# Altium PCB Copy of Line_follower1_PCB.PcbDoc (part 1 of 2)
Units mil, origin at the board's own origin, x right, y up, seen from the top; angles counter-clockwise.
Board outline 6000 x 4000 mil, 2 copper layers (Top Layer, Bottom Layer); 67 components, 62 nets, 271 pads, 117 vias.
Unrouted connection lines stored in the file: 3.
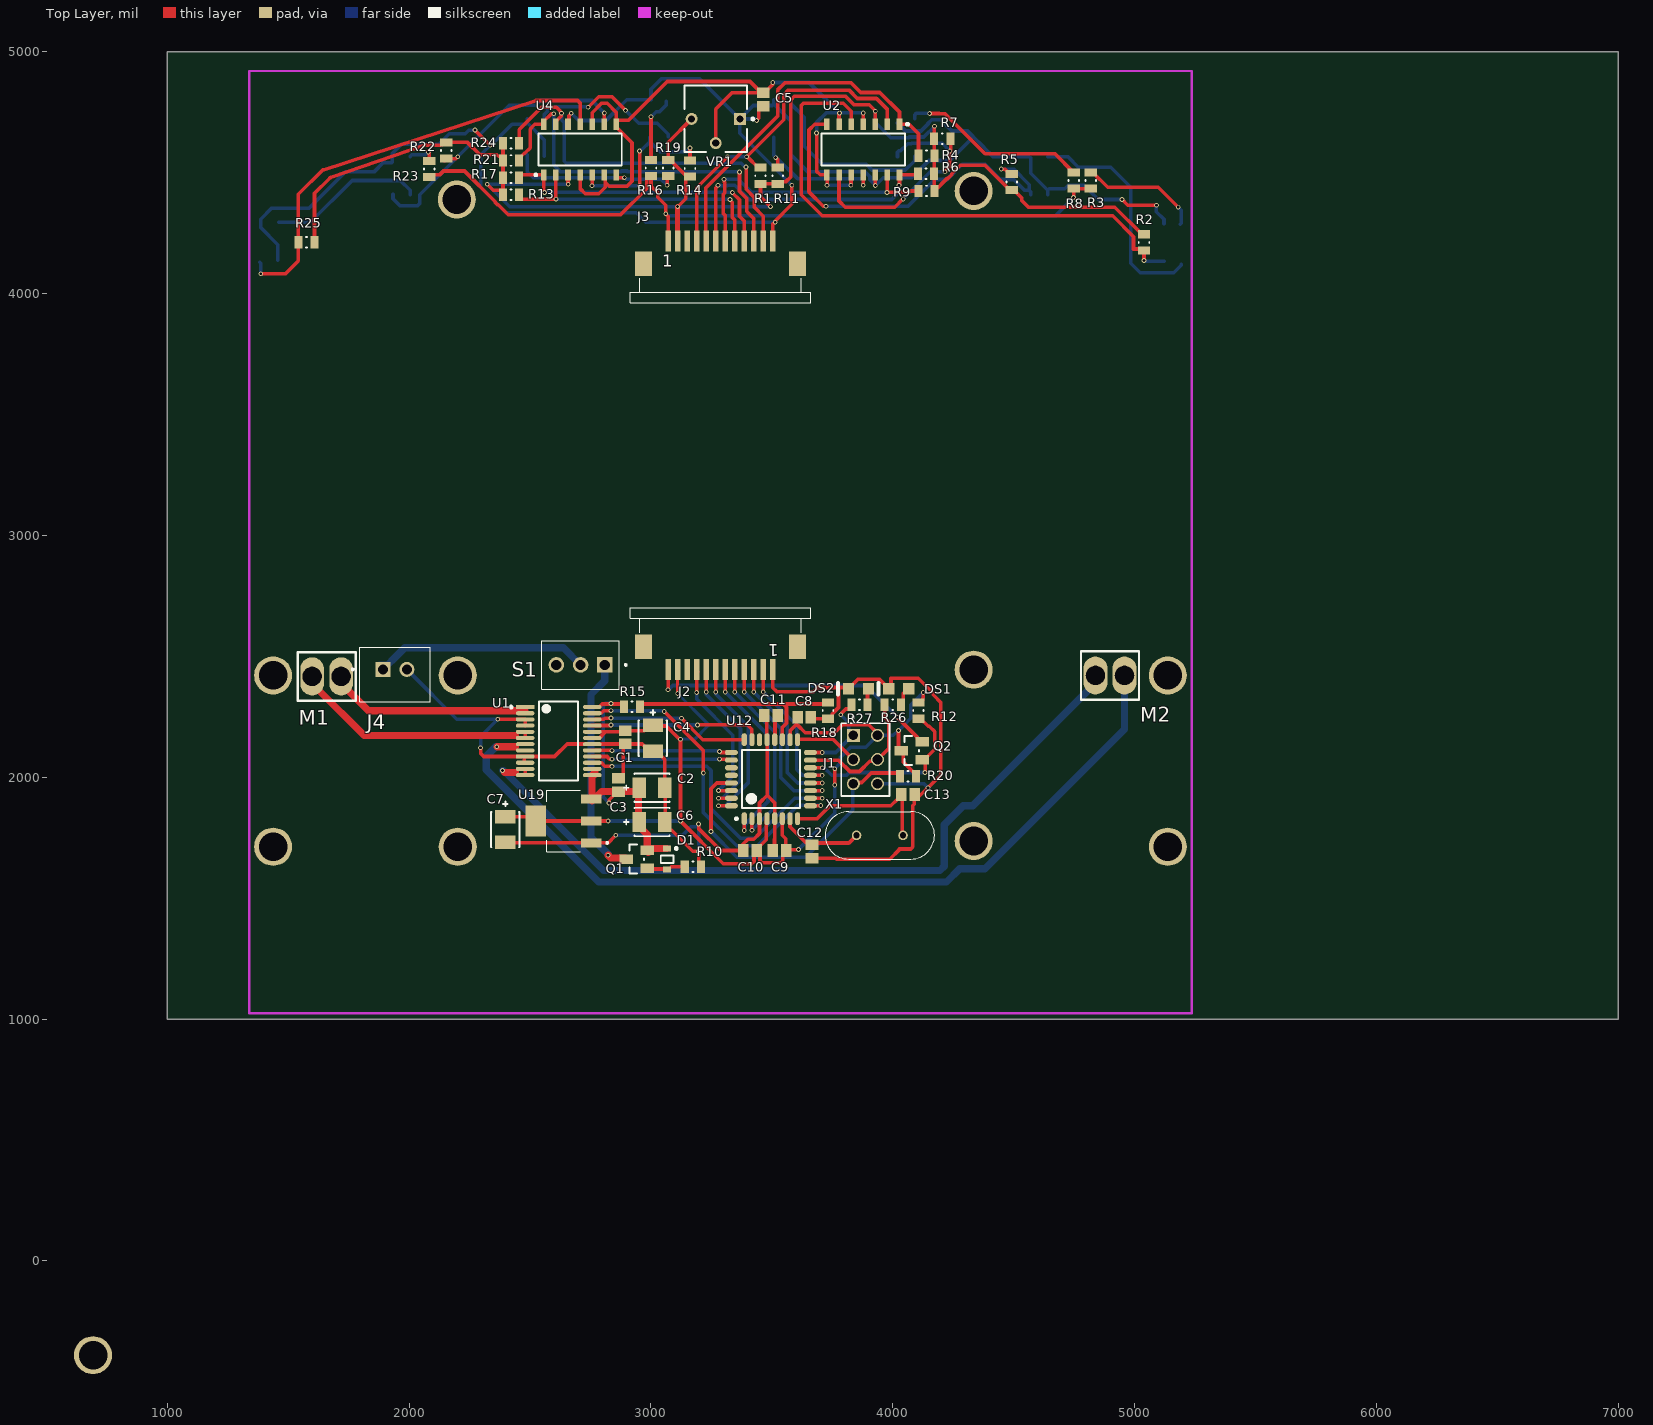
[diagram p0: Top Layer view]
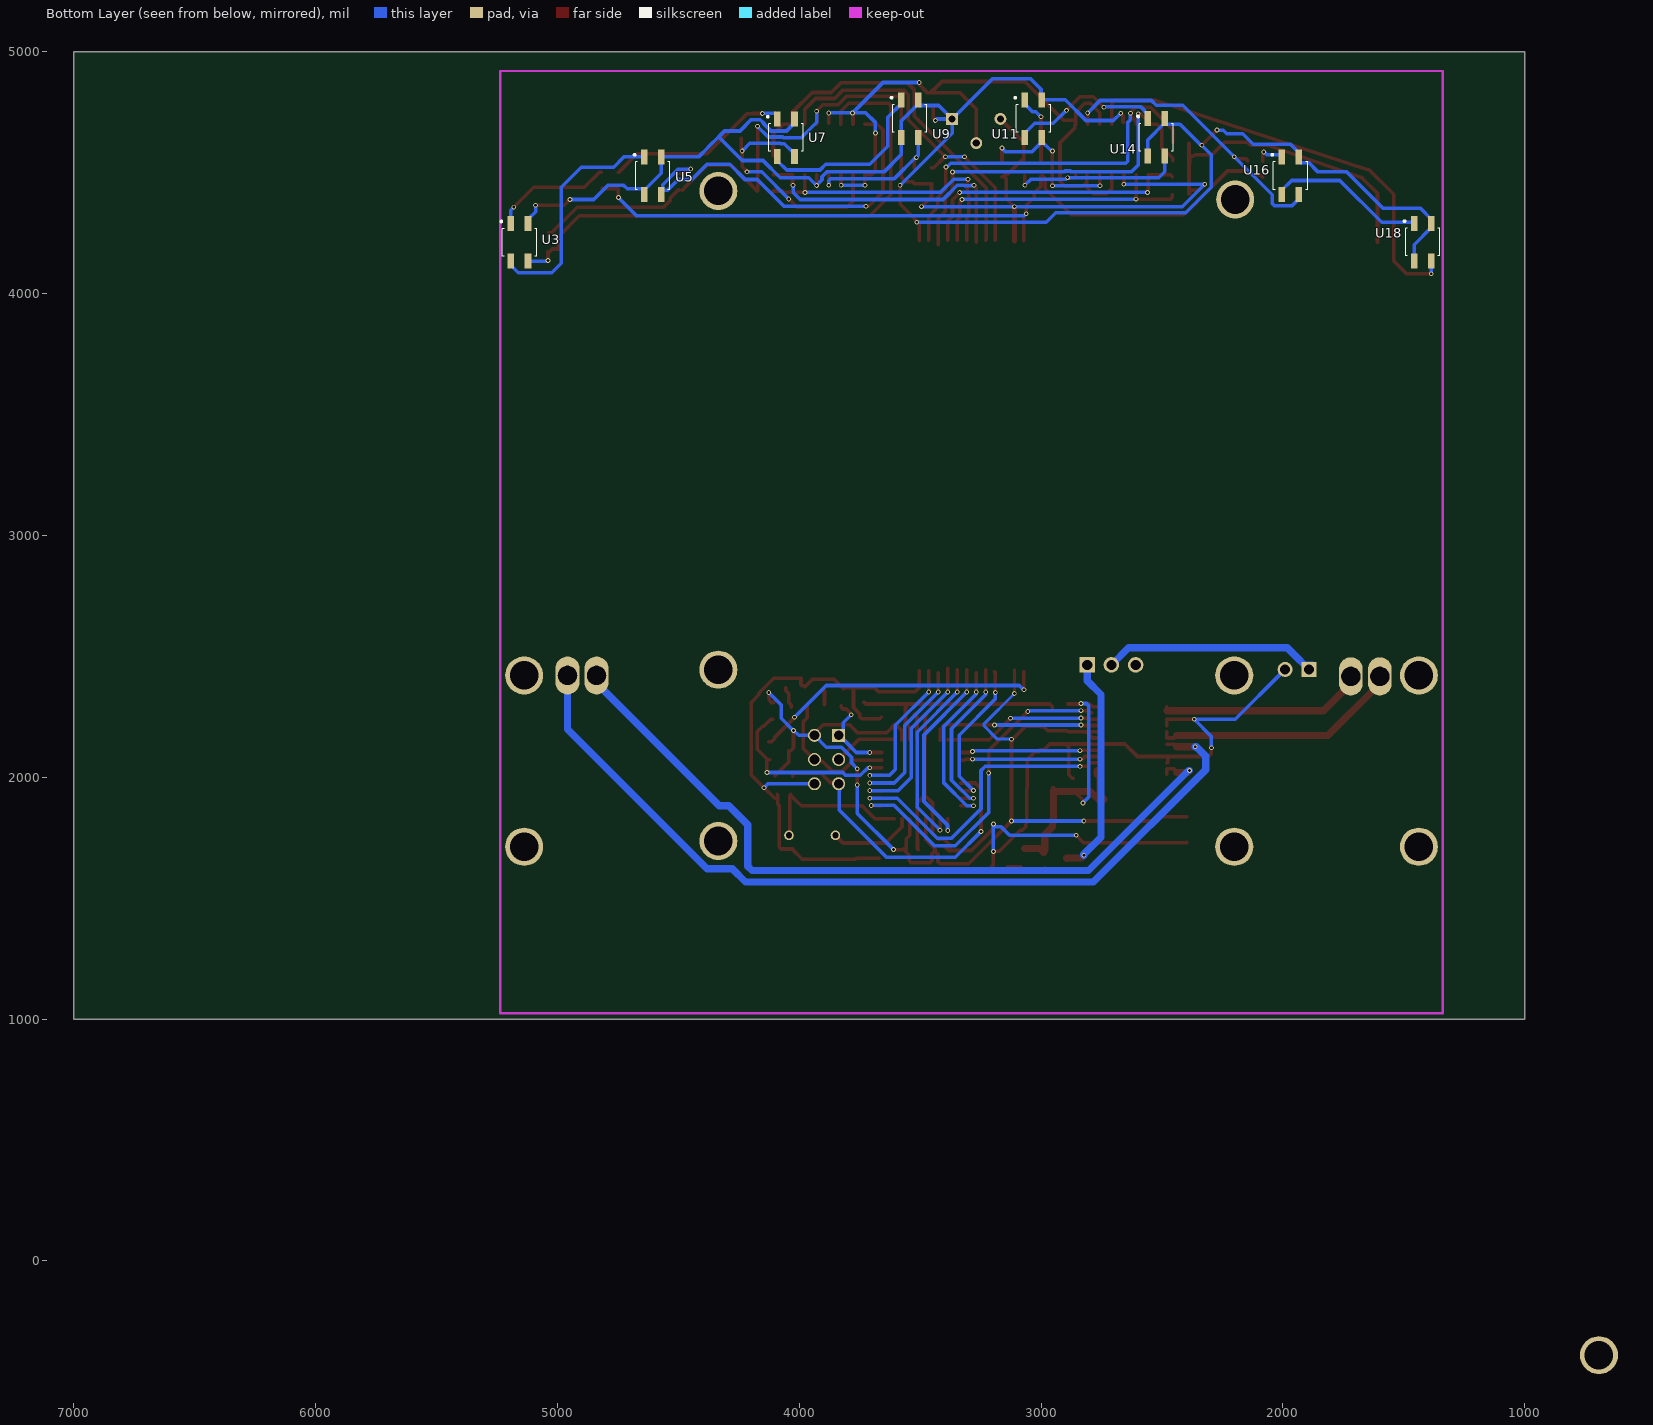
[diagram p1: Bottom Layer view, seen from below]

## Layer stack, top to bottom
Top Solder: solder mask 0.4, Solder Resist, Dk 3.5
Top Layer: signal copper 1.4
Dielectric 1: dielectric 12.6, FR-4, Dk 4.8
Bottom Layer: signal copper 1.4
Bottom Solder: solder mask 0.4, Solder Resist, Dk 3.5

## Board outline
1000,1000 7000,1000 7000,5000 1000,5000

## Design rules (kind name [scope] priority, off if disabled: settings)
Clearance [All] p1: gap=10 ignorepadtopadclearanceinfootprint=FALSE except(0: Arc-Hole Track-Hole SMDPad-Hole THPad-Hole Via-Hole Fill-Hole Poly-Hole Region-Hole Text-Hole; 5: SMDPad-SMDPad; 7.87: Arc-SMDPad Track-SMDPad; 19.68: THPad-THPad)
HoleSize [All] p1: absolutevalues=TRUE maxlimit=248.03 minlimit=11.81 maxpercent=80.000 minpercent=20.000
PolygonConnect [All] p1: connectstyle=Relief reliefconductorwidth=10 reliefentries=4 polygonreliefangle="90 Angle" airgapwidth=10
RoutingVias [All] p1: holewidth=11.81 width=19.68 viastyle="Through Hole" minholewidth=11.81 minwidth=19.68 maxholewidth=19.68 maxwidth=27.56
SilkToSolderMaskClearance [IsPad] p1: minsilkscreentomaskgap=3.94 clearancetoexposedcopper=TRUE
SolderMaskExpansion SolderMaskExpansion_Vias [IsVia] p1: expansion=4 istentingtop=TRUE
SolderMaskExpansion [All] p2: expansion=4 istentingtop=FALSE
Width [All] p1: maxlimit=100 minlimit=10 preferedwidth=19.68 minimp=50.000000 maximp=50.000000 favimp=50.000000
28 further rules are at their usual default settings.

## Components (designator, comment, footprint, x,y, rotation, side; value= is the part's Value field where it differs from the comment)
C1 "100n" CAPC2013X88X50LL20T25 2893.7,2165.35 r90 top
C2 "10u" FP-T491B106K020AT-MFG 3003.94,1956.69 r180 top
C3 "100n" CAPC2013X88X50LL20T25 2866.14,1968.5 r270 top
C4 "10u" FP-T491B106K020AT-MFG 3007.87,2161.42 r90 top
C5 "100n" CAPC2013X88X50LL20T25 3464.57,4803.15 r90 top
C6 "10u" FP-T491B106K020AT-MFG 3003.94,1814.96 r180 top
C7 "10u" FP-T491B106K020AT-MFG 2397.64,1783.46 r90 top
C8 "100n" CAPC2013X88X50LL20T25 3633.86,2248.03 r180 top
C9 "100n" CAPC2013X88X50LL20T25 3531.5,1696.85 r0 top
C10 "100n" CAPC2013X88X50LL20T25 3409.45,1696.85 r0 top
C11 "100n" CAPC2013X88X50LL20T25 3496.06,2255.91 r0 top
C12 "22p" CAPC2013X88X50LL20T25 3665.35,1692.91 r270 top
C13 "22p" CAPC2013X88X50LL20T25 4062.99,1929.13 r0 top
D1 "MM3Z10VT1G" ONSC-SOD-323-2-477-02_V 3066.93,1661.42 r270 top
DS1 "HSMG-C170" AVAG-HSMX-C170_V 4025.59,2366.14 r180 top
DS2 "HSMG-C170" AVAG-HSMX-C170_V 3858.27,2366.14 r180 top
J1 "TSW-103-15-F-D" SAMTEC_TSW-103-15-F-D 3837.01,2173.23 r270 top
J2 "68611214422" 68611214422 3287.4,2539.37 r180 top
J3 "68611214422" 68611214422 3287.4,4124.02 r0 top
J4 "B2B-XH-A(LF)(SN)" JST_B2B-XH-A(LF)(SN) 1940.94,2425.2 r180 top
M1 "Component_1" PCBComponent_1 1718.43,2417.32 r180 top
M2 "Component_1" PCBComponent_1 4838.58,2421.26 r0 top
Q1 "FDN340P" FP-527AG-MFG 2940.95,1661.42 r180 top
Q2 "FDN340P" FP-527AG-MFG 4078.74,2110.24 r180 top
R1 "10k" RESC0805(2012)_L 3452.76,4488.19 r270 top value="12000.00 Ohm"
R2 "10k" RESC0805(2012)_L 5039.37,4212.6 r90 top value="12000.00 Ohm"
R3 "220R" RESC0805(2012)_L 4818.9,4468.5 r90 top value="12000.00 Ohm"
R4 "10k" RESC0805(2012)_L 4139.76,4570.87 r0 top value="12000.00 Ohm"
R5 "10k" RESC0805(2012)_L 4492.13,4462.6 r270 top value="12000.00 Ohm"
R6 "10k" RESC0805(2012)_L 4137.8,4496.06 r0 top value="12000.00 Ohm"
R7 "10k" RESC0805(2012)_L 4204.72,4641.73 r180 top value="12000.00 Ohm"
R8 "220R" RESC0805(2012)_L 4748.03,4468.5 r90 top value="12000.00 Ohm"
R9 "10k" RESC0805(2012)_L 4139.76,4425.2 r0 top value="12000.00 Ohm"
R10 "10k" RESC0805(2012)_L 3173.23,1629.92 r180 top value="12000.00 Ohm"
R11 "10k" RESC0805(2012)_L 3523.62,4488.19 r270 top value="12000.00 Ohm"
R12 "10k" RESC0805(2012)_L 4106.3,2275.59 r90 top value="12000.00 Ohm"
R13 "10k" RESC0805(2012)_L 2421.26,4409.45 r180 top value="12000.00 Ohm"
R14 "10k" RESC0805(2012)_L 3161.42,4517.72 r270 top value="12000.00 Ohm"
R15 "10k" RESC0805(2012)_L 2921.26,2291.34 r180 top value="12000.00 Ohm"
R16 "220R" RESC0805(2012)_L 3000,4519.69 r90 top value="12000.00 Ohm"
R17 "10k" RESC0805(2012)_L 2421.26,4480.31 r180 top value="12000.00 Ohm"
R18 "10k" RESC0805(2012)_L 3732.28,2275.59 r90 top value="12000.00 Ohm"
R19 "10k" RESC0805(2012)_L 3070.87,4519.69 r90 top value="12000.00 Ohm"
R20 "10k" RESC0805(2012)_L 4062.99,2003.94 r180 top value="12000.00 Ohm"
R21 "10k" RESC0805(2012)_L 2421.26,4551.18 r180 top value="12000.00 Ohm"
R22 "10k" RESC0805(2012)_L 2153.54,4592.52 r90 top value="12000.00 Ohm"
R23 "220R" RESC0805(2012)_L 2082.68,4515.75 r90 top value="12000.00 Ohm"
R24 "10k" RESC0805(2012)_L 2421.26,4622.05 r180 top value="12000.00 Ohm"
R25 "10k" RESC0805(2012)_L 1574.8,4212.6 r0 top value="12000.00 Ohm"
R26 "470R" RESC0805(2012)_L 4000,2299.21 r180 top value="12000.00 Ohm"
R27 "470R" RESC0805(2012)_L 3862.2,2299.21 r180 top value="12000.00 Ohm"
S1 "2MS1T1B1M2QES" SW_2MS1T1B1M2QES 2708.66,2464.57 r180 top
U1 "TB6612FNG,C,8,EL" FP-SSOP24-P-300-0_65A-IPC_A 2618.11,2149.61 r0 top
U2 "LM339DR2G" ONSC-SOIC-14-751A-03_V 3877.95,4596.46 r270 top
U3 "QRE1113GR" SOIC180P460X187-4N 5157.48,4212.6 r180 bottom
U4 "LM339DR2G" ONSC-SOIC-14-751A-03_V 2706.69,4596.46 r90 top
U5 "QRE1113GR" SOIC180P460X187-4N 4606.3,4488.19 r180 bottom
U7 "QRE1113GR" SOIC180P460X187-4N 4055.12,4645.67 r180 bottom
U9 "QRE1113GR" SOIC180P460X187-4N 3543.31,4724.41 r180 bottom
U11 "QRE1113GR" SOIC180P460X187-4N 3031.5,4724.41 r180 bottom
U12 "ATmega328-AUR" 32A_L 3496.06,1992.13 r90 top
U14 "QRE1113GR" SOIC180P460X187-4N 2523.62,4646.65 r180 bottom
U16 "QRE1113GR" SOIC180P460X187-4N 1968.5,4488.19 r180 bottom
U18 "QRE1113GR" SOIC180P460X187-4N 1421.26,4213.58 r180 bottom
U19 "LM1117MP-5.0" SOT230P700X180-4N 2637.8,1818.9 r180 top
VR1 "3362P-1-103LF" BOUR-3362P 3267.72,4724.41 r180 top
X1 "ABL-16.000MHZ-T" XTAL_HC49P488W46L1150T500H350 3946.46,1759.84 r180 top

## Footprints (in the part's own frame and the unit in brackets; to place one, negate y for a bottom-side part, rotate by r counter-clockwise, add the part's x,y. Pads: shape width x height; smd on the part's side, far side on the other; paste and mask are expansions set on the pad)
32A_L [mm] "Thin QFP, 32-Leads, Body 7x7mm, Pitch 0.8mm, IPC High Density"
  oval 1.35x0.55 smd: 1(-4.15,2.8) 2(-4.15,2) 3(-4.15,1.2) 4(-4.15,0.4) 5(-4.15,-0.4) 6(-4.15,-1.2) 7(-4.15,-2) 8(-4.15,-2.8) 17(4.15,-2.8) 18(4.15,-2) 19(4.15,-1.2) 20(4.15,-0.4) 21(4.15,0.4) 22(4.15,1.2) 23(4.15,2) 24(4.15,2.8)
  oval 0.55x1.35 smd: 9(-2.8,-4.15) 10(-2,-4.15) 11(-1.2,-4.15) 12(-0.4,-4.15) 13(0.4,-4.15) 14(1.2,-4.15) 15(2,-4.15) 16(2.8,-4.15) 25(2.8,4.15) 26(2,4.15) 27(1.2,4.15) 28(0.4,4.15) 29(-0.4,4.15) 30(-1.2,4.15) 31(-2,4.15) 32(-2.8,4.15)
  silkscreen extent -4.27,-3.05 3.05,3.75, body extent -3.5,-3.5 3.5,3.5, height 1.2
68611214422 [mm]
  rect 0.6x2.2 smd: 1(-5.5,2.4) 2(-4.5,2.4) 3(-3.5,2.4) 4(-2.5,2.4) 5(-1.5,2.4) 6(-0.5,2.4) 7(0.5,2.4) 8(1.5,2.4) 9(2.5,2.4) 10(3.5,2.4) 11(4.5,2.4) 12(5.5,2.4)
  rect 1.8x2.6 smd: Z1(-8.1,0) Z2(8.1,0)
  silkscreen extent -9.5,-4.1 9.5,-1.5
AVAG-HSMX-C170_V [mm] "SMD, 2-Leads, Body 2x1.25mm, Height 0.8mm"
  rect 1.2x1.2 smd: 1(-1.05,0) 2(1.05,0)
  silkscreen extent 2.15,-0.63 2.15,0.63, body extent -1,-0.63 1,0.63, height 0.8
BOUR-3362P [mm] "THD, 3-Leads, Body 6.6x6.99mm, Pitch 2.54mm"
  rect 1.25x1.25 hole 0.75: 1(-2.54,0.035)
  round 1.25 hole 0.75: 2(0,2.575) 3(2.54,0.035)
  silkscreen extent -4.03,-3.49 3.3,3.5, body extent -3.3,-3.49 3.3,3.49, height 4.95
CAPC2013X88X50LL20T25 [mm] "Chip Capacitor, 2-Leads, Body 2.00x1.25mm, IPC High Density"
  rect 1.1x1.35 smd: 1(-0.7,0) 2(0.7,0)
  body extent -1.1,-0.72 1.1,0.72, height 0.88
FP-527AG-MFG [mm]
  rect 1.4x1 smd paste+0 mask+0: 1(-1.1,0.95) 2(-1.1,-0.95) 3(1.1,0)
  silkscreen extent -0.76,-1.52 0.76,1.52, body extent -1.9,-1.62 1.9,1.62, height 0.25
FP-SSOP24-P-300-0_65A-IPC_A [mm]
  rect 1.954x0.432 smd paste+0 mask+0: 1(-3.525,3.575)
  rrect100% 1.954x0.432 smd paste+0 mask+0: 2(-3.525,2.925) 3(-3.525,2.275) 4(-3.525,1.625) 5(-3.525,0.975) 6(-3.525,0.325) 7(-3.525,-0.325) 8(-3.525,-0.975) 9(-3.525,-1.625) 10(-3.525,-2.275) 11(-3.525,-2.925) 12(-3.525,-3.575) 13(3.525,-3.575) 14(3.525,-2.925) 15(3.525,-2.275) 16(3.525,-1.625) 17(3.525,-0.975) 18(3.525,-0.325) 19(3.525,0.325) 20(3.525,0.975) 21(3.525,1.625) 22(3.525,2.275) 23(3.525,2.925) 24(3.525,3.575)
  silkscreen extent -5.13,-4.15 2.05,4.15, body extent -5,-4.65 5,4.65, height 0.25
FP-T491B106K020AT-MFG [mm]
  rect 1.42x2.13 smd paste+0 mask+0: 1(-1.35,0) 2(1.35,0)
  silkscreen extent -1.85,-1.5 2.95,1.5, body extent -2.18,-1.62 2.18,1.62, height 0.25
JST_B2B-XH-A(LF)(SN) [mm]
  rect 1.575x1.575 / inner round 1.575 / far side rect 1.575x1.575 hole 1.05: 1(1.25,-0.525)
  round 1.575 hole 1.05: 2(-1.25,-0.525)
  silkscreen extent -3.7,-2.88 4.54,2.88, body extent -3.7,-2.88 3.7,2.88, height 7
ONSC-SOD-323-2-477-02_V [mm] "SOD, 2-Leads, Body 1.7x1.25mm"
  rect 0.63x0.83 smd: 1(-1.115,0) 2(1.115,0)
  silkscreen extent -1.24,-0.67 0.4,1.09, body extent -0.85,-0.63 0.85,0.63, height 1.06
ONSC-SOIC-14-751A-03_V [mm] "SOIC, 14-Leads, Body 8.75x4mm, Pitch 1.27mm"
  rect 1.18x0.58 smd: 1(-2.66,3.81) 2(-2.66,2.54) 3(-2.66,1.27) 4(-2.66,0) 5(-2.66,-1.27) 6(-2.66,-2.54) 7(-2.66,-3.81) 8(2.66,-3.81) 9(2.66,-2.54) 10(2.66,-1.27) 11(2.66,0) 12(2.66,1.27) 13(2.66,2.54) 14(2.66,3.81)
  silkscreen extent -2.78,-4.38 1.67,4.78, body extent -2,-4.38 2,4.38, height 1.75
PCBComponent_1 [mm]
  oval 2.5x4 hole 2: 1(0,0) 2(3.048,0)
  silkscreen extent -1.52,-2.54 4.57,2.54
RESC0805(2012)_L [mm] "Chip Resistor, Body 2.0x1.3mm, IPC High Density"
  rect 0.85x1.3 smd: 1(-0.85,0) 2(0.85,0)
  silkscreen extent -0.05,-0.55 0.05,0.55, body extent -1.1,-0.67 1.1,0.68, height 0.7
SAMTEC_TSW-103-15-F-D [mm]
  rect 1.37x1.37 hole 1.02: 01(0,0)
  round 1.37 hole 1.02: 02(0,2.54) 03(2.54,0) 04(2.54,2.54) 05(5.08,0) 06(5.08,2.54)
  silkscreen extent -2.02,-1.27 6.35,3.81
SOIC180P460X187-4N [mm]
  rect 0.69x1.57 smd: 1(-0.9,1.975) 2(-0.9,-1.975) 3(0.9,-1.975) 4(0.9,1.975)
  silkscreen extent -2,-1.45 1.8,2.3, body extent -1.7,-2.3 1.7,2.3, height 1.87
SOT230P700X180-4N [mm]
  rect 2.15x0.95 smd: 1(-2.9,2.3) 2(-2.9,0) 3(-2.9,-2.3)
  rect 2.15x3.25 smd: 4(2.9,0)
  silkscreen extent -4.7,-3.25 1.75,3.25
SW_2MS1T1B1M2QES [mm]
  rect 1.635x1.635 / inner round 1.635 / far side rect 1.635x1.635 hole 1.09: 1(-2.54,0)
  round 1.635 hole 1.09: 2(0,0) 3(2.54,0)
  silkscreen extent -4.85,-2.54 4.07,2.54, body extent -4.07,-3 4.07,3, height 23.63
XTAL_HC49P488W46L1150T500H350 [mm]
  round 1.007 hole 0.657: 1(-2.44,0) 2(2.44,0)
  silkscreen extent -5.75,-2.5 5.75,2.5, body extent -5.75,-3.25 5.75,5.75, height 2.5

## Part data
C1 C3 C5 C8 C9 C10 C11 C12 C13: library part CMP-2007-00266-1, "0805", Manufacturer=Kemet, Part Number=C0805C103K5RACTU
C2 C4 C6 C7: library part CMP-2000-07191-2, "CAP TANT 10UF 10% 20V 1411", Capacitance=10uF, Case Code (Imperial)=1411, Case Code (Metric)=3528, Dielectric Material=Tantalum, ESR (Equivalent Series Resistance)=2.1R, Leakage Current=2uA, Max Operating Temperature=125°C, Min Operating Temperature=-55°C, Package Quantity=1, Ripple Current=201mA, Tolerance=10%, Voltage=20V, Case/Package=1411, Depth=2.8mm, Dissipation Factor=6%, Failure Rate=0.001%, Features="General Purpose", Height=1.9mm, Height - Seated (Max)=0.083inch, Lead Free="Lead Free", Length=3.5mm, Life (Hours)=2000Hour, Mount="Surface Mount", Number of Pins=2, Packaging="Tape and Reel", Polarity=Polar, Radiation Hardening=No, REACH SVHC="No SVHC", RoHS Compliant=Yes, Termination=SMD/SMT, Voltage Rating=20V, Voltage Rating (DC)=20V, Weight=0.002293oz, Width=2.8mm
D1: library part CMP-1060-00715-1, "Zener Voltage Regulator, 300 mW, 2-Pin SOD-323, Pb-Free, Tape and Reel", Manufacturer="On Semiconductor", ComponentLink1Description="Manufacturer URL", ComponentLink1URL=http://www.onsemi.com/, ComponentLink2Description=Datasheet, ComponentLink2URL=http://www.onsemi.cn/pub_link/Collateral/MM3Z2V4T1-D.PDF, ComponentLink3Description="Package Specification", ComponentLink3URL=http://www.onsemi.com/pub_link/Collateral/477-02.PDF.1, DatasheetVersion="Rev. 9", Mounting Technology="Surface Mount", P Max (W)=0.3, PackageDescription="2-Pin SOD, Body 1.7 x 1.25 mm", PackageReference=SOD-323-2-477-02, PackageVersion="Rev. H, 03/2007", Packing="Tape and Reel", PartNumber=MM3Z10VT1G, RoHS=Pb-Free, VZ Typ (V)=10
DS1 DS2: library part CMP-2000-05062-1, "Chip LED, Green, 2.2 V, -40 to 85 degC, 2-Pin SMD, Pb-Free, Tape and Reel", Forward Current If=20mA, Forward Voltage=2.2V, Forward Voltage VF Max=2.6V, LED Colour=Green, Manufacturer=Avago, Operating Temperature Max=85degC, Operating Temperature Min=-30degC, Operating Temperature Range=-30degCto+85degC, Opto Case Style=SMD, Package Description="2-Pin Surface Mount Device, Body 2 x 1.25 mm, Height 0.8 mm", Package Reference=HSMX-C170, Storage Temperature Min=-40degC, Bulb Size=1.25mmx1.4mm, Datasheet URL=https://datasheet.ciiva.com/29280/180495-da-01-en-chip-led-hsmg-c170-gelb-gruen-29280971.pdf, Datasheet Version=Oct-08, Dominant Wavelength=572nm, Dominant Wavelength Typ=572nm, External Depth=0.8mm, External Length / Height=2mm, External Width=1.25mm, Forward Current If Max=20mA, LED Mounting=SMD, LED Type=Standard, Lens Shape=Rectangular, Light Area Height=1mm, Luminous Intensity=15mcd, Luminous Intensity Min=4mcd, Luminous Intensity Typ=15mcd, Manufacturer URL=http://www.avagotech.com/, Mounting Type=SMD, MSL=MSL2A-4weeks, No. of Pins=2, Opto Mounting Orientation=Top, Packaging=CutTape, Peak Forward Current=20mA, Peak Wavelength=570nm, PIV Max=5V, Storage Temperature Max=85degC, SVHC=NoSVHC(16-Jun-2014), Viewing Angle=170deg, Voltage Vf Typ=2.2V, Wavelength Typ=570nm
J1: Package=None, Availability=Unavailable, MP=TSW-103-15-F-D, Price=None
J2 J3: "12 Position FPC Connector Contacts, Bottom 0.039 (1.00mm) Surface Mount, Right Angle", Package=None, Availability="In Stock", Check_prices=https://www.snapeda.com/parts/68611214422/Wurth+Elektronik/view-part/?ref=eda, MF="Wurth Elektronik", MP=68611214422, Price=None, Purchase-URL=https://pricing.snapeda.com/search/part/68611214422/?ref=eda, SnapEDA_Link=https://www.snapeda.com/parts/68611214422/Wurth+Elektronik/view-part/?ref=snap
J4: "Connector Header Through Hole 2 position 0.098 (2.50mm)", Package=None, Check_prices=https://www.snapeda.com/parts/B2B-XH-A(LF)(SN)/JST+Sales+America+Inc./view-part/?ref=eda, MF="JST Sales America Inc.", MP=B2B-XH-A(LF)(SN), SnapEDA_Link=https://www.snapeda.com/parts/B2B-XH-A(LF)(SN)/JST+Sales+America+Inc./view-part/?ref=snap
M1 M2: "Pady do silnika"
Q1 Q2: library part CMP-2100-03638-2, "MOSFET P-CH 20V 2A SSOT3", Case/Package=SOT-23, Continuous Drain Current (ID)=2A, Current Rating=-2A, Drain to Source Breakdown Voltage=-20V, Drain to Source Resistance=60mR, Drain to Source Voltage (Vdss)=20V, Gate to Source Voltage (Vgs)=8V, Input Capacitance=779pF, Max Operating Temperature=150°C, Max Power Dissipation=500mW, Min Operating Temperature=-55°C, On-State Resistance=70MR, Package Quantity=1, Threshold Voltage=-800mV, Contact Plating=Tin, Dual Supply Voltage=-20V, Element Configuration=Single, Fall Time=11ns, Height=0.94mm, Lead Free="Lead Free", Length=2.92mm, Mount="Surface Mount", Nominal Vgs=-800mV, Number of Elements=1, Number of Pins=3, Packaging="Tape and Reel", Power Dissipation=500mW, Radiation Hardening=No, Rds On Max=70mR, REACH SVHC="No SVHC", Rise Time=9ns, Termination=SMD/SMT, Turn-Off Delay Time=27ns, Turn-On Delay Time=10ns, Voltage Rating (DC)=-20V, Weight=0.03g, Width=3.05mm
R1 R2 R4 R5 R6 R7 R9 R10 R11 R12 R13 R14 R15 R17 R18 R19 R20 R21 R22 R24 R25: library part CMP-1013-00631-1, "10K 0.125W 1% 0805 (2012 Metric)  SMD", Case-EIA=0805, Case-Metric=2012, Power="0.125 W", Tolerance="1 %", Technology=SMT
R3 R8 R16 R23 R26 R27: library part CMP-1013-00631-1, "220 0.125W 1% 0805 (2012 Metric)  SMD", Case-EIA=0805, Case-Metric=2012, Power="0.125 W", Tolerance="1 %", Technology=SMT
S1: "Toggle Switches Sub-Miniature SPDT switch on-on pc thru-hole", Package=None, Check_prices=https://www.snapeda.com/parts/2MS1T1B1M2QES/E%2526E/view-part/?ref=eda, MF=Dailywell, MP=2MS1T1B1M2QES, SnapEDA_Link=https://www.snapeda.com/parts/2MS1T1B1M2QES/E%2526E/view-part/?ref=snap
U1: library part CMP-2100-03693-4, "IC MOTOR DRIVER 2.7V-5.5V 24SSOP", Case/Package=SSOP, Max Operating Temperature=85°C, Max Supply Voltage=5.5V, Min Operating Temperature=-20°C, Min Supply Voltage=2.7V, Operating Supply Voltage=3V, Output Current=1A, Package Quantity=1, Interface=Parallel, Logic Function="AND GATE", Mount="Surface Mount", Number of Outputs=2, Number of Pins=24, Packaging="Tape and Reel", Series=-
U2 U4: library part CMP-1305-00036-1, "Single Supply Quad Comparators, 0 to 70 degC, 14-Pin SOIC, Pb-Free, Tape and Reel", Manufacturer="On Semiconductor", ComponentLink1Description="Manufacturer URL", ComponentLink1URL=http://www.onsemi.com/, ComponentLink2Description=Datasheet, ComponentLink2URL=http://www.onsemi.com/pub_link/Collateral/LM339-D.PDF, ComponentLink3Description="Package Specification", ComponentLink3URL=http://www.onsemi.com/pub_link/Collateral/751A-03.PDF, DatasheetVersion="Rev. 20", IO Typ (mA)=16, Mounting Technology="Surface Mount", PackageDescription="14-Pin Small Outline Integrated Circuit, Body 8.65 x 3.9 mm, Pitch 1.27 mm", PackageReference=SOIC-14-751A-03, PackageVersion="Rev. K, 05/2011", Packing="Tape and Reel", PartNumber=LM339DR2G, RoHS=TRUE
U3 U5 U7 U9 U11 U14 U16 U18: "Reflective Optical Sensor 0.039 (1mm) 4-SMD, Gull Wing", Package="ARUSM-313-4 ON Semiconductor", Availability="In Stock", Check_prices=https://www.snapeda.com/parts/QRE1113GR/Onsemi/view-part/?ref=eda, MF="ON Semiconductor", MP=QRE1113GR, Price=None, Purchase-URL=https://pricing.snapeda.com/search/part/QRE1113GR/?ref=eda, SnapEDA_Link=https://www.snapeda.com/parts/QRE1113GR/Onsemi/view-part/?ref=snap
U12: library part CMP-0095-00268-2, "8-bit AVR Microcontroller, 32KB Flash, 1KB EEPROM, 2KB SRAM, 32-pin TQFP, Industrial Grade (-40°C to 85°C), Reel", Code_JEDEC=MS-026-ABA, ComponentLink1Description="Manufacturer URL", ComponentLink1URL=http://www.atmel.com/, ComponentLink2Description="ATmega48A/48PA/88A/88PA/168A/168PA/328/328P Datasheet", ComponentLink2URL=http://www.atmel.com/dyn/resources/prod_documents/doc8271.pdf, ComponentLink3Description="ATmega48A/48PA/88A/88PA/168A/168PA/328/328P Summary", ComponentLink3URL=http://www.atmel.com/dyn/resources/prod_documents/8271S.pdf, DatasheetVersion="revD, May-2011", PackageDescription="32-Lead, 7x7x1.0 mm Body, 0.8mm Lead Pitch, Thin Profile Plastic Quad Flat Package (TQFP)", PackageReference=32A, PackageVersion="revC, Oct-2010", RevisionNote="DatasheetVersion & PackageVersion updated. URLs added."
U19: "Space Saving 800mA Low-Dropout Linear Regulator with Internal Current Limit", Package="SOT-223-4 Texas Instruments", Availability=Unavailable, DigiKey-Purchase-URL=https://snapeda.com/shop?store=DigiKey&id=22380, MF="Texas Instruments", Mouser-Purchase-URL=https://snapeda.com/shop?store=Mouser&id=22380, MP=LM1117MP-5.0/NOPB, Price=None, SnapEDA_Link=https://www.snapeda.com/parts/LM1117MP-5.0/NOPB/Texas%20Instruments/view-part/22380/?ref=snap, Texas_Instruments-Purchase-URL=https://snapeda.com/shop?store=Texas+Instruments&id=22380
VR1: library part CMP-1747-00004-1, "Square Trimpot(R) Trimming Potentiometer, 10 KOhm, 300 V, -55 to 125 degC, 3-Pin THD, RoHS, Tube", Case Code (Imperial)=0612, Case Code (Metric)=1632, Case/Package=1206, Max Operating Temperature=125degC, Min Operating Temperature=-25degC, Package Quantity=5000, Power Rating="1 W", Resistance="50 mohm", Tolerance=1%, Voltage Rating="220 mV", ComponentLink1Description="Manufacturer URL", ComponentLink1URL=http://www.bourns.com/, ComponentLink2Description=Datasheet, ComponentLink2URL=http://www.bourns.com/docs/Product-Datasheets/3362.pdf, DatasheetVersion=May-16, Height="0.6 mm", Length="3.2 mm", Mount="Surface Mount", PackageDescription="3-Pin Through Hole Device, Body 6.6 x 6.99 mm, Pitch 2.54 mm", PackageReference=3326P, Packaging="Tape and Reel", Pins=2, REACH SVHC="No SVHC", RoHSCompliant=True, Width="1.6 mm"
X1: "16 MHz Â±10ppm Crystal 18pF 40 Ohms HC-49/US", Package=None, Availability="In Stock", Check_prices=https://www.snapeda.com/parts/ABL-16.000MHZ/Abracon/view-part/?ref=eda, MF="Abracon Corporation", MP=ABL-16.000MHZ, Price=None, Purchase-URL=https://pricing.snapeda.com/search/part/ABL-16.000MHZ/?ref=eda, SnapEDA_Link=https://www.snapeda.com/parts/ABL-16.000MHZ/Abracon/view-part/?ref=snap

## Free pads (board coordinates)
  round 157.48 hole 118.11: 0(692.04,-390.45) 0(1437.01,1712.6) 0(1437.01,2421.26) 0(2196.85,4389.76) 0(2200.79,1712.6) 0(2200.79,2421.26) 0(4334.65,1736.22) 0(4334.65,2444.88) 0(4334.65,4425.2) 0(5137.8,1712.6) 0(5137.8,2421.26)

## Via types
v1: diameter 19.68, hole 11.81, Top Layer to Bottom Layer, tented both sides, 117 vias

## Nets (pads, with @x,y where several pads share a name; then routed paths per layer and width w, separated by ;. In a path a pad name is that pad's centre, name@x,y a point inside that pad or via, vN(x,y) a via of type N, cw(c..) or ccw(c..) an arc to the next point about the centre after c; other vN are vias at no path point)
+5: C1.2 C4.2 C7.2 C8.2 C9.2 C10.2 J1.02 J2.11 J3.2 Q2.3 R1.2 R2.2 R4.2 R5.2 R6.2 R7.2 R9.2 R11.2 R12.2 R13.2 R14.2 R17.2 R19.2 R20.1 R21.2 R22.2 R24.2 R25.2 U1.19 U1.20 U2.3 U4.3 U12.4 U12.6 U12.18 U19.2 U19.4 VR1.3 | length 10737.8
  Top Layer w12: v1(3110.24,2346.46) J2.11 ; v1@3118.11,2153.54 3120.08,2155.51 v1(3122.05,2157.48)
  Top Layer w15: R25.2 1608.27,4415.35 1670.78,4477.86 cw(c1681.38,4467.25) 1676.51,4481.44 2062.99,4614.17 2067.01,4614.17 2068.38,4615.55 2089.1,4615.55 2090.47,4614.17 2129.92,4614.17 2132.5,4616.75 2135.45,4616.75 R22.2@2145.67,4626.97 ; R22.2 2241.33,4625.98 2292.51,4574.8 2362.2,4574.8 ; v1(2322.83,4452.76) 2348.05,4427.54 2378.56,4427.54 2385.83,4420.28 R13.2@2385.83,4413.39 ; 2369.7,4569.27 2378.56,4569.27 R21.2@2387.8,4560.04 ; R21.2@2385.83,4540.35 R21.2@2385.83,4555.12 ; R13.2@2387.8,4413.39 R17.2 R21.2@2387.8,4547.24 ; R21.2 R24.2 ; C7.2 2513.78,1836.61 U19.4@2519.68,1830.71 ; U19.4@2515.75,1822.83 U19.4@2515.75,1830.71 ; U19.4@2519.69,1818.9 U19.4 U19.2 v1(2822.83,1818.9) ; U4.3 2656.69,4453.54 v1(2657.48,4452.76) ; U1.19 2786.85,2162.4 2810.26,2185.81 ; U1.20 2757.29,2188.38 2807.09,2188.38 ; 2807.09,2188.98 2807.69,2188.38 C1.2@2886.43,2188.38 ; C1.2 2972.24,2192.91 2987.99,2208.66 C4.2@3000,2208.66 ; C4.2 3010.37,2212.07 3063.52,2212.07 3120.08,2155.51 3122.05,2153.54 v1(3122.05,1818.9) 3299.21,1641.73 3417.32,1641.73 3426.11,1650.52 3426.11,1682.02 C10.2@3440.94,1696.85 ; v1(3110.24,4360.24) 3143.33,4393.33 3143.33,4475.02 3152.56,4484.25 R14.2 ; R14.2@3157.48,4484.25 3148.25,4493.48 3139.39,4493.48 3079.72,4553.15 R19.2 3070.87,4626.18 3165.35,4720.67 VR1.3@3165.35,4724.41 ; C10.2@3437.01,1701.77 3476.38,1741.14 U12.4@3476.38,1830.71 ; C10.2@3438.98,1694.88 3451.16,1682.7 3451.16,1654.46 3459.95,1645.67 3535.43,1645.67 3544.9,1655.14 3544.9,1677.78 C9.2@3560.04,1692.91 ; v1(3494.09,4360.24) 3452.76,4401.57 R1.2 R11.2@3521.65,4454.72 ; R11.2 3532.85,4463.96 3558.44,4463.96 3578.74,4484.25 3578.74,4803.15 3593.11,4817.52 3804.53,4817.52 3839.76,4782.28 3902.76,4782.28 v1@3927.95,4757.09 ; U12.6 3543.31,1759.84 3557.22,1745.93 C9.2@3557.22,1702.62 ; C9.2@3559.06,1701.77 C9.2 3566.93,1704.72 3570.87,1700.79 v1(3610.24,1700.79) ; U12.18 3576.08,2156.78 3576.08,2193.2 3602.85,2219.98 ; 3606.3,2216.54 3638.41,2184.43 3759.23,2184.43 3792.5,2217.7 3900.41,2217.7 J1.02@3937.01,2181.1 ; v1(3759.84,1968.5) v1(3759.84,2035.43) ; U2.3 v1(3927.95,4754.72) ; v1(4023.62,2192.91) 4023.62,2122.05 Q2.3 ; Q2.3@4043.31,2110.24 4043.31,2062.99 R20.1@4100.39,2005.91 ; R12.2 4115.16,2309.06 4124.39,2318.29 4124.39,2327.15 4125.98,2328.74 v1(4125.98,2350.39) ; R6.2 4172.24,4497.05 R4.2@4172.24,4570.87 ; R6.2@4172.24,4493.11 4172.24,4426.18 R9.2 4224.84,4476.81 4227.86,4476.81 4243.88,4492.83 4243.88,4495.85 4279.53,4531.5 4381.89,4531.5 4474.04,4439.35 4474.04,4438.37 4483.27,4429.13 R5.2@4484.25,4429.13 ; R4.2 4172.24,4571.85 4172.24,4638.78 4169.29,4641.73 4172.33,4644.77 4172.33,4692.02 v1(4173.23,4692.91) ; R5.2@4496.06,4429.13 4500.98,4429.13 4533.77,4396.35 4533.77,4385.83 4561.33,4358.27 4918.31,4358.27 5024.61,4251.97 R2.2@5035.43,4251.97
  Top Layer w20: J3.2 v1(3110.24,4360.24)
  Bottom Layer w12: v1(3110.24,2346.46) 3235.19,2221.51 3235.19,2211.56 3181.1,2157.48 v1(3122.05,2157.48)
  Bottom Layer w15: v1(2657.48,4452.76) v1(2322.83,4452.76) 2415.35,4360.24 v1(3110.24,4360.24) v1(3494.09,4360.24) ; v1(2822.83,1818.9) v1(3122.05,1818.9) ; v1(3610.24,1700.79) 3759.84,1850.39 v1(3759.84,1968.5) ; v1(3759.84,2035.43) 3783.91,2059.5 3783.91,2083.13 3825.24,2124.45 3888.23,2124.45 J1.02 4002.67,2173.23 4022.35,2192.91 v1(4023.62,2192.91) 4074.8,2244.09 4074.8,2299.21 v1(4125.98,2350.39) ; v1(3927.95,4754.72) 3927.95,4709.84 3992.13,4645.67 4066.93,4645.67 4069.49,4648.23 4128.54,4648.23 v1(4173.23,4692.91)
+5_LED: J2.12 Q2.2 | length 1236.8
  Top Layer w15: v1(3070.87,2362.2) J2.12@3070.87,2437.01 ; v1(4019.68,2248.03) 4019.68,2246.76 4101.99,2164.46 4101.99,2159.82 4114.17,2147.64 Q2.2@4125.98,2147.64
  Bottom Layer w15: v1(3070.87,2362.2) 3072.13,2362.2 3089.63,2379.7 3888.01,2379.7 v1(4019.68,2248.03)
+BAT: C2.2 C3.2 C6.2 D1.1 Q1.2 R15.2 U1.13 U1.14 U1.24 U19.3 | length 1360.2
  Top Layer w15: U1.13@2755.93,2007.93 U1.13 ; U1.14 2760.33,2034.45 U1.14@2767.72,2027.06 ; U1.24 2758.91,2290.35 2759.84,2291.28 2786.2,2291.28 2797.85,2302.93 v1@2834.65,2302.93 ; v1(2826.77,1893.7) 2827.67,1894.6 2827.67,1907.39 2861.22,1940.94 C3.2@2862.2,1940.94 ; v1(2834.65,2305.28) 2834.65,2303.15 v1@2834.65,2302.93 ; R15.2@2889.76,2303.15 2889.55,2302.93 v1@2834.65,2302.93 ; C2.2@2935.04,1940.94 C2.2 C2.2@2946.85,1956.69
  Top Layer w30: U19.3@2740.16,1909.45 2744.73,1909.45 2755.93,1920.65 U1.13@2755.93,2007.93 ; U19.3@2755.91,1901.57 2795.28,1940.94 C3.2@2861.22,1940.94 ; U1.13@2767.72,2011.81 U1.14@2767.72,2027.06 ; C3.2@2862.2,1940.94 C3.2 C2.2@2935.04,1940.94 ; C6.2@2948.82,1816.93 C2.2@2948.82,1944.88 ; C6.2@2952.76,1822.83 2952.76,1795.08 2984.25,1763.58 Q1.2 ; Q1.2@2988.19,1688.98 2988.19,1689.19 3004.31,1705.31 D1.1
  Bottom Layer w15: v1(2826.77,1893.7) 2803.15,1917.32 2803.15,2296.49 2811.94,2305.28 v1(2834.65,2305.28)
/A_DIR: U1.21 U12.23 | length 714.5
  Top Layer w15: U1.21 2757.29,2213.97 2796.72,2213.97 ; 2796.73,2213.98 2832.9,2213.98 v1(2834.65,2215.72) ; v1(3192.91,2216.54) 3399.94,2216.54 3417.32,2199.16 U12.23 U12.23@3417.32,2153.54
  Bottom Layer w15: v1(2834.65,2215.72) 2835.05,2216.13 3192.51,2216.13 v1(3192.91,2216.54)
/B_DIR: U1.17 U12.25 | length 577.5
  Top Layer w15: U1.17 2837.42,2111.22 v1(2838.58,2110.06) ; v1(3283.46,2106.3) 3284.73,2106.3 3288.67,2102.36 U12.25@3330.71,2102.36
  Bottom Layer w15: v1(2838.58,2110.06) 3278.44,2110.06 3282.2,2106.3 v1(3283.46,2106.3)
A_DIR: U1.22 U12.24 | length 658
  Top Layer w15: U1.22@2767.72,2238.97 2768.31,2239.56 2805.18,2239.56 2810.13,2244.51 2833.75,2244.51 v1(2834.65,2245.4) ; v1(3125.98,2244.09) 3214.57,2155.51 U12.24
  Bottom Layer w15: v1(2834.65,2245.4) 2835.3,2244.75 3125.33,2244.75 v1(3125.98,2244.09)
A_PWM: U1.23 U12.9 | length 1409.5
  Top Layer w15: U1.23@2791.34,2266.47 2796.74,2266.47 2804.96,2274.69 2833.75,2274.69 v1(2834.65,2275.59) ; v1(3055.12,2272.09) 3216.54,2110.67 v1(3216.54,2017.78) ; U12.9 3659.91,1882.35 3701.95,1882.35 v1(3702.4,1882.8)
  Bottom Layer w15: v1(2834.65,2275.59) 3050.35,2275.59 3053.85,2272.09 v1(3055.12,2272.09) ; v1(3216.54,2017.78) 3216.54,1854.33 3354.33,1716.54 3440.95,1716.54 3608.11,1883.7 3701.51,1883.7 v1(3702.4,1882.8)
B_DIR: U1.16 U12.26 | length 576
  Top Layer w15: U1.16 2817.86,2085.63 2828.68,2074.8 v1(2838.58,2074.8) ; v1(3283.46,2074.8) 3311.19,2074.8 3315.13,2070.87 U12.26@3326.77,2070.87
  Bottom Layer w15: v1(2838.58,2074.8) v1(3283.46,2074.8)
B_PWM: U1.15 U12.10 | length 1291
  Top Layer w15: U1.15 2757.29,2059.65 2795.42,2059.65 2809.06,2046.01 2837.69,2046.01 v1(2838.58,2045.12) ; U12.10 v1(3708.66,1913.39)
  Bottom Layer w15: v1(2838.58,2045.12) 3230.47,2045.12 3248.03,2027.56 3248.03,1870.08 3370.08,1748.03 3429.13,1748.03 3594.49,1913.39 v1(3708.66,1913.39)
BAT: Q1.3 S1.1 | length 916
  Top Layer w30: v1(2822.83,1677.17) 2833.9,1666.1 2892.95,1666.1 Q1.3@2893.7,1665.35
  Bottom Layer w30: S1.1 2808.66,2399.21 2751.97,2342.52 2751.97,1751.97 2822.83,1681.1 v1(2822.83,1677.17)
D1: J2.9 U12.30 | length 633.3
  Top Layer w15: v1(3188.98,2350.39) 3188.98,2433.07 J2.9@3192.91,2437.01 ; v1(3279.53,1944.88) U12.30
  Bottom Layer w15: v1(3188.98,2350.39) 3188.98,2323.95 3338.58,2174.34 3338.58,2003.94 v1(3279.53,1944.88)
D2: J2.8 U12.31 | length 689.2
  Top Layer w15: v1(3228.35,2352.36) J2.8 ; v1(3279.53,1913.39) U12.31
  Bottom Layer w15: v1(3228.35,2352.36) 3229.24,2351.47 3229.24,2341.62 3370.08,2200.79 3370.08,2098.43 ; v1(3279.53,1913.39) 3295.28,1913.39 3370.08,1988.19 3370.08,2097.57
D3: J2.7 U12.32 | length 724.5
  Top Layer w15: v1(3267.72,2352.36) J2.7@3267.72,2431.1 ; v1(3279.53,1881.89) U12.32
  Bottom Layer w15: v1(3267.72,2352.36) 3267.72,2344.49 3401.57,2210.63 3401.57,1976.38 3307.09,1881.89 v1(3279.53,1881.89)
D4: J2.6 U12.1 | length 829.5
  Top Layer w15: v1(3307.09,2352.36) J2.6 ; v1(3385.83,1779.53) U12.1
  Bottom Layer w15: v1(3307.09,2352.36) 3484.25,2175.2 3484.25,1899.61 3386.72,1802.08 3386.72,1781.69 3386.53,1781.5 v1@3385.83,1781.5 ; v1(3385.83,1779.53) 3386.72,1780.42 v1@3386.72,1781.5
D5: J2.5 U12.2 | length 820.6
  Top Layer w15: v1(3346.46,2352.36) J2.5 ; v1(3417.32,1780.57) U12.2
  Bottom Layer w15: v1(3346.46,2352.36) 3512.4,2186.42 3512.4,1875.64 v1(3417.32,1780.57)
D6: J2.4 U12.11 | length 758
  Top Layer w15: v1(3385.83,2352.36) J2.4 J2.4@3385.83,2450.79 ; U12.11 v1(3708.66,1944.88)
  Bottom Layer w15: v1(3385.83,2352.36) 3537.4,2200.79 3537.4,1998.03 3590.55,1944.88 v1(3708.66,1944.88)
D7: J2.3 U12.12 | length 680.8
  Top Layer w15: v1(3425.2,2352.36) J2.3@3425.2,2431.1 ; U12.12 v1(3708.66,1976.38)
  Bottom Layer w15: v1(3425.2,2352.36) 3562.99,2214.57 3562.99,2020.6 3607.21,1976.38 v1(3708.66,1976.38)
D8: J2.2 U12.13 | length 631.3
  Top Layer w15: v1(3464.57,2352.36) J2.2@3464.57,2440.94 ; U12.13 v1(3708.66,2007.87)
  Bottom Layer w15: v1(3464.57,2352.36) 3602.36,2214.57 3602.36,2032.41 3626.9,2007.87 v1(3708.66,2007.87)
GND: C1.1 C2.1 C3.1 C4.1 C5.1 C6.1 C7.1 C8.1 C9.1 C10.1 C11.1 C12.2 C13.2 DS1.2 DS2.2 J1.06 J2.1 J3.12 J4.2 R10.1 R18.1 U1.3 U1.4 U1.9 U1.10 U1.18 U2.12 U3.4 U4.12 U5.2 U5.4 U7.4 U9.2 U9.4 U11.4 U12.3 U12.5 U12.21 U14.2 U14.4 U16.4 U18.2 U18.4 U19.1 VR1.1 | length 14305.6
  Top Layer w15: v1(2272,4676.81) v1(2334.65,4614.17) ; v1(2295.28,2122.05) 2295.28,2098.43 2308.07,2085.63 2475.45,2085.63 U1.9@2476.38,2086.56 ; v1(2366.14,2239.75) 2366.43,2239.46 2479.03,2239.46 U1.3 ; C7.1 2399.61,1728.35 U19.1@2748.03,1728.35 ; U1.9@2476.38,2082.68 2476.38,2060.97 2477.31,2060.04 U1.10 ; U1.9 2601.06,2085.63 2653.23,2137.8 U1.18@2744.09,2137.8 ; U1.4 U1.3@2479.32,2238.24 ; U4.12@2657.48,4708.66 2660.61,4711.79 2660.61,4735.76 2670.45,4745.6 v1(2670.45,4746.87) ; U19.1 2822.83,1728.35 v1(2854.33,1759.84) ; U1.18 2757.29,2137.2 2790.74,2137.2 2790.95,2137.4 C1.1@2889.37,2137.4 ; C3.1 2871.06,1996.06 2885.22,2010.22 2885.22,2123.64 2899.37,2137.8 2964.37,2137.8 2987.99,2114.17 C4.1@3003.94,2114.17 ; C4.1@3007.87,2106.3 3023.82,2106.3 3057.09,2073.03 C2.1 ; C6.1 3059.06,1816.93 C2.1@3059.06,1952.76 ; C6.1@3062.99,1803.15 3062.99,1795.08 3077.54,1780.53 3085.61,1780.53 3172.33,1693.81 3195.95,1693.81 v1(3196.85,1692.91) 3197.75,1692.02 3197.75,1636.9 R10.1@3204.72,1629.92 ; v1(3196.85,1807.09) 3196.85,1788.1 3288.1,1696.85 C10.1@3377.95,1696.85 ; C10.1@3396.04,1711 C10.1 C10.1@3377.95,1696.85 ; v1(3437.01,4716.54) 3437.01,4717.8 3445.49,4726.29 3445.49,4768.33 C5.1@3452.76,4775.59 ; U12.3 3448.82,1767.72 3425.2,1744.09 3401.57,1744.09 3377.95,1720.47 C10.1@3377.95,1696.85 ; U12.3@3448.82,1842.52 3448.82,1893.7 3480.32,1925.2 ; C11.1@3472.44,2255.91 3479.04,2249.3 3479.04,2156.78 U12.21 3480.32,1925.2 ; J2.1@3503.94,2440.94 3503.94,2370.08 3519.68,2354.33 3673.23,2354.33 3690.35,2371.46 DS2.2@3809.65,2371.46 ; J3.12 3503.94,4290.07 3507.09,4290.07 3512.51,4295.49 v1(3513.78,4295.49) ; C9.1@3507.87,1700.79 3510.91,1703.83 3510.91,1743.2 3511.81,1744.09 U12.5 3511.81,1893.7 3480.32,1925.2 ; v1@3513.78,4299.91 3513.78,4301.18 3582.68,4370.08 v1(3582.68,4448.82) ; C8.1 3667.32,2242.13 R18.1 3741.14,2242.13 3750.37,2251.36 3750.37,2263.08 3775.59,2288.3 3775.59,2370.08 ; C12.2@3669.29,1665.35 3763.78,1665.35 3767.72,1661.42 3988.19,1661.42 4027.56,1700.79 ; DS2.2 3855.93,2405.14 3945.26,2405.14 DS1.2@3976.38,2374.02 ; v1(3927.95,4447.64) U2.12 ; DS1.2@3980.32,2377.95 3988.73,2377.95 3993.04,2382.26 3993.04,2409.45 4105.6,2409.45 4167.08,2347.97 4167.08,2340.79 4198.23,2309.65 4198.23,2009.25 v1(4145.67,1956.69) C13.2@4101.87,1912.89 ; 4027.56,1703.02 4073.89,1703.02 4082.68,1711.81 4082.68,1882.87 4088.65,1888.85 4088.65,1927.23 C13.2 ; v1(4948.82,4389.76) 4972.44,4366.14 v1(5090.55,4366.14)
  Bottom Layer w15: U18.2@1456.69,4137.8 1456.69,4203.15 1385.83,4274.02 U18.4 1385.83,4308.66 1431.5,4354.33 1585.83,4354.33 1735.43,4503.94 1854.33,4503.94 1892.93,4542.54 1926.99,4542.54 1929.13,4544.69 1929.13,4579.33 1967.91,4618.11 2122.05,4618.11 2165.35,4661.42 2232.16,4661.42 2246.66,4675.92 2271.11,4675.92 v1(2272,4676.81) ; J4.2@1996.06,2433.07 2002.95,2433.07 2196.27,2239.75 v1(2366.14,2239.75) 2295.28,2168.89 v1(2295.28,2122.05) ; U14.4 U14.4@2488.19,4707.09 ; U14.2 2559.06,4636.22 U14.4@2488.19,4707.09 ; v1(2670.45,4746.87) 2700.79,4716.54 2814.26,4716.54 2899.89,4802.17 U11.4 ; v1(2854.33,1759.84) 3129.92,1759.84 3165.35,1795.28 3188.98,1795.28 3196.85,1803.15 v1(3196.85,1692.91) ; U11.4@3000,4803.15 3000,4846.46 3043.31,4889.76 3200.98,4889.76 VR1.1 ; VR1.1@3370.08,4736.22 3380.91,4736.22 3423.44,4778.76 3501.79,4778.76 U9.4@3507.87,4784.84 ; v1(3437.01,4716.54) 3430.51,4723.03 VR1.1 ; U9.4 U9.4@3507.87,4784.84 ; v1(3513.78,4295.49) 2978.13,4295.49 2938.98,4334.65 2401.57,4334.65 2295.28,4440.94 2295.28,4574.8 v1(2334.65,4614.17) 2338.58,4614.17 2425.41,4701 2482.11,4701 U14.4@2488.19,4707.09 ; v1(3582.68,4448.82) 3367.72,4663.78 VR1.1 ; J1.06@3937.01,1972.44 4129.92,1972.44 v1@4144.1,1958.26 ; U7.4@4019.68,4706.1 4052.56,4673.23 4116.78,4673.23 4145.89,4702.33 4145.89,4704.24 4161.9,4720.26 4163.81,4720.26 4164.03,4720.47 4197.99,4720.47 4245.23,4673.23 4309.46,4673.23 4329.93,4652.76 ; 4330.71,4653.54 4330.71,4651.98 ; 4375.2,4607.49 4330.71,4651.98 ; 4376.39,4606.3 4416.74,4565.94 U5.4@4562.99,4565.94 ; U5.4@4570.87,4562.99 4570.87,4498.62 U5.2@4641.73,4427.76 ; U5.2 U5.2@4641.73,4427.76 ; v1(4948.82,4389.76) 4850.39,4389.76 4791.34,4448.82 4727.07,4448.82 4712.09,4433.84 4647.81,4433.84 U5.2@4641.73,4427.76 ; v1(5090.55,4366.14) 5090.55,4339.17 5122.05,4307.68 U3.4 ; U9.4@3507.87,4784.84 3578.74,4713.98 U9.2 3578.74,4574.8 3649.61,4503.94 3885.83,4503.94 3905.84,4483.92 3905.84,4471.02 3928.04,4448.82 3929.13,4448.82 3960.63,4480.31 4078.74,4480.31 4149.61,4551.18 4235.52,4551.18 4330.71,4646.37 4330.71,4651.98
IR_D1: J3.4 R1.1 U2.2 | length 1402.9
  Top Layer w15: J3.4@3188.98,4222.44 3188.98,4438.98 v1(3316.93,4566.93) ; v1@3395.67,4566.03 3399.52,4566.03 3443.9,4521.65 R1.1 ; v1(3395.67,4566.93) 3548.62,4719.88 3548.62,4823.11 3568.03,4842.52 3818.9,4842.52 3853.74,4807.68 3932.48,4807.68 3977.95,4762.2 U2.2
  Bottom Layer w15: v1(3316.93,4566.93) v1(3395.67,4566.93)
IR_D2: J3.5 R4.1 U2.1 | length 1546.6
  Top Layer w15: J3.5@3228.35,4222.44 3225.85,4224.94 3225.85,4436.48 3274.43,4485.06 3274.43,4485.14 3290.45,4501.16 3290.53,4501.16 3523.62,4734.25 3523.62,4842.52 3553.15,4872.05 3828.74,4872.05 3868.11,4832.68 3946.85,4832.68 4027.95,4751.57 U2.1 ; U2.1@4027.95,4700.79 4066.93,4700.79 4106.3,4661.42 R4.1
IR_D3: J3.6 R6.1 U2.14 | length 1178.9
  Top Layer w15: J3.6@3267.72,4212.6 3267.72,4437.71 3277.56,4447.55 v1(3277.56,4448.82) ; v1(4025.59,4448.82) 4027.95,4451.18 U2.14 4028.35,4492.13 R6.1@4106.3,4492.13
  Bottom Layer w15: v1(3277.56,4448.82) 3278.46,4447.92 3289,4447.92 3290.45,4446.48 3315.06,4446.48 3317.4,4448.82 3346.46,4448.82 3405.51,4389.76 3996.06,4389.76 4024.69,4418.4 4024.69,4447.92 v1(4025.59,4448.82)
IR_D4: J3.7 R9.1 U2.13 | length 1159.6
  Top Layer w15: v1(3301.77,4473.82) 3302.67,4472.92 3302.67,4462.38 3304.9,4460.14 3304.9,4417.03 3299.15,4411.28 3299.15,4331.53 3307.09,4323.59 J3.7@3307.09,4222.44 ; v1@3976.38,4417.32 3978.35,4419.29 4064.96,4419.29 4070.87,4425.2 R9.1 ; v1@3977.95,4420.87 U2.13
  Bottom Layer w15: v1(3301.77,4473.82) 3360.83,4473.82 3415.35,4419.29 v1(3976.38,4419.29)
IR_D5: J3.8 R13.1 U4.2 | length 1160.1
  Top Layer w15: R13.1@2456.69,4409.45 2456.69,4398.62 2463.96,4391.36 v1@2606.67,4391.36 ; v1(2606.69,4391.34) U4.2 ; v1(3326.49,4389.48) 3326.49,4388.21 3336.61,4378.09 3336.61,4315.04 3346.46,4305.2 J3.8@3346.46,4222.44
  Bottom Layer w15: v1(2606.69,4391.34) 3323.36,4391.34 3325.22,4389.48 v1(3326.49,4389.48)
IR_D6: J3.9 R17.1 U4.1 | length 1171.4
  Top Layer w15: R17.1@2456.69,4484.25 2456.69,4484.47 2463.96,4491.73 U4.1 2556.69,4421.65 v1(2559.06,4419.29) ; v1(3336.61,4419.29) 3336.61,4418.02 3366.14,4388.5 3366.14,4320.87 3385.83,4301.18 J3.9@3385.83,4222.44
  Bottom Layer w15: v1(2559.06,4419.29) v1(3336.61,4419.29)
IR_D7: J3.10 R21.1 U4.14 | length 1595.2
  Top Layer w15: R21.1 2454.72,4560.04 2475.77,4581.08 2477.82,4581.08 2500,4603.26 2500,4681.1 2519.68,4700.79 U4.14@2551.18,4700.79 ; U4.14 2556.69,4712.99 2588.33,4744.63 2597.22,4744.63 v1(2597.54,4744.31) ; v1(3366.14,4503.94) 3366.14,4423.85 3395.67,4394.32 3395.67,4340.55 3425.2,4311.02 J3.10 J3.10@3425.2,4202.76
  Bottom Layer w15: v1(2597.54,4744.31) 2598.43,4743.42 2598.43,4531.23 2624.34,4505.31 2876.1,4505.31 2878.44,4507.66 2901.09,4507.66 2904.81,4503.94 v1(3366.14,4503.94)
IR_D8: J3.11 R24.1 U4.13 | length 1628.6
  Top Layer w15: R24.1@2454.72,4627.95 2454.72,4679.13 2547.24,4771.65 2608.86,4771.65 2624.88,4755.64 2624.88,4753.18 2629.92,4748.14 v1(2629.92,4746.87) ; U4.13 2606.69,4712.99 2629.03,4735.32 v1@2629.03,4747.14 ; v1(3393.48,4523.84) 3393.48,4431.86 3427.76,4397.59 3427.76,4357.68 3464.57,4320.87 J3.11@3464.57,4222.44
  Bottom Layer w15: v1(2629.92,4746.87) 2630.82,4745.97 2630.82,4719.1 2641.73,4708.19 2641.73,4548.16 2650.52,4539.37 3372.89,4539.37 3387.52,4524.73 3392.59,4524.73 v1(3393.48,4523.84)
LED: J3.1 R3.1 R8.1 R16.1 R23.1 | length 3212
  Top Layer w15: R23.1 2091.91,4491.52 2125.37,4491.52 2141.73,4507.87 ; 2145.67,4507.87 2228.35,4507.87 2355.69,4380.53 2355.69,4377.49 2364.69,4368.48 2367.74,4368.48 2409.45,4326.77 2874.02,4326.77 2981.91,4434.67 2981.91,4476.99 2993.11,4488.19 R16.1@2996.06,4488.19 ; R16.1 3000,4444.88 3027.56,4417.32 3027.56,4399.61 3061.02,4366.14 v1(3061.02,4330.71) 3061.02,4329.44 3070.87,4319.6 J3.1 ; v1(4748.03,4397.64) R8.1 4812.99,4435.04 R3.1@4814.96,4437.01
  Bottom Layer w15: v1(3061.02,4330.71) 3062.29,4330.71 3070.17,4322.83 4673.23,4322.83 v1(4748.03,4397.64)
LED_ON: Q2.1 R12.1 U12.14 | length 769.5
  Top Layer w15: U12.14 v1(3708.66,2039.37) ; R12.1@4110.24,2240.16 4117.13,2240.16 4146.35,2210.94 4151.27,2210.94 4173.23,2188.98 4173.23,2116.14 4129.92,2072.83 Q2.1 ; v1(4133.86,2019.68) Q2.1@4133.86,2070.87
  Bottom Layer w15: v1(3708.66,2039.37) 3709.56,2038.47 3716.73,2038.47 3747.11,2008.09 3808.98,2008.09 3820.58,2019.68 v1(4133.86,2019.68)
MISO: J1.01 R27.2 U12.16 | length 383
  Top Layer w15: U12.16 v1(3708.66,2102.36) ; v1(3784.63,2258.67) 3784.63,2259.94 3789.51,2264.81 3789.51,2265.89 3805.91,2282.29 3819.51,2282.29 3826.77,2289.55 R27.2@3826.77,2295.28 ; J1.01@3826.77,2173.23 J1.01
  Bottom Layer w15: v1(3708.66,2102.36) 3763.78,2102.36 3815.18,2153.76 3817.54,2153.76 J1.01@3834.65,2170.87 ; v1(3784.63,2258.67) 3817.54,2225.77 3817.54,2192.7 J1.01
MOSI: J1.04 R26.2 U12.15 | length 564.7
  Top Layer w15: U12.15 3775.59,2070.87 3822.83,2023.62 3862.2,2023.62 3904.43,2065.85 3929.63,2065.85 3984.25,2120.47 3984.25,2228.35 3966.54,2246.06 R26.2@3966.54,2293.31
NetC5_2: C5.2 U2.4 U2.6 U2.8 U2.10 U4.4 U4.6 U4.8 U4.10 VR1.2 | length 3012.7
  Top Layer w15: U4.4 2706.69,4435.04 2728.35,4413.39 2783.46,4413.39 2811.02,4440.94 2811.02,4460.63 ; U4.10 2756.69,4748.82 2795.28,4787.4 2818.9,4787.4 2856.69,4749.61 U4.8@2856.69,4712.99 ; U4.6@2809.06,4482.28 2810.61,4480.73 2810.61,4461.04 2811.02,4460.63 ; U4.6@2811.02,4484.25 U4.6@2811.02,4492.13 ; VR1.2@3267.72,4625.98 3267.72,4763.78 3334.65,4830.71 3459.65,4830.71 3445.49,4844.86 3442.54,4844.86 3409.45,4877.95 3066.93,4877.95 2905.89,4716.91 2860.61,4716.91 U4.8@2856.69,4712.99 ; C5.2 3469.49,4830.71 3503.94,4865.16 v1(3503.94,4874.02) ; v1(3685.04,4665.35) 3685.04,4507.09 3700.39,4491.73 U2.8 3728.35,4491.34 v1(3728.35,4448.82) ; U2.6 3777.95,4746.46 v1(3779.53,4748.03) ; v1(3826.77,4449.04) 3827.36,4449.63 U2.10@3827.36,4491.54 ; U2.4@3877.95,4704.72 v1(3877.95,4748.03) ; 2811.02,4460.63 2826.77,4444.88 2900.66,4444.88 2921.26,4465.48 2921.26,4624.8 2860.61,4685.45 2860.61,4696.85 2857.09,4700.37 2857.09,4700.79 U4.8 U4.8@2856.69,4712.99
  Bottom Layer w15: v1(3503.94,4874.02) 3653.54,4874.02 v1(3779.53,4748.03) ; v1(3685.04,4665.35) 3685.04,4708.66 3724.41,4748.03 v1(3779.53,4748.03) ; v1(3728.35,4448.82) v1@3818.9,4448.82 ; v1(3877.95,4748.03) v1(3779.53,4748.03)
NetC11_2: C11.2 U12.20 | length 109.2
  Top Layer w15: U12.20 3513.08,2156.78 3513.08,2249.3 C11.2@3523.62,2259.84
NetC12_1: C12.1 U12.7 X1.2 | length 350
  Top Layer w15: U12.7 3574.8,1795.28 3641.95,1728.13 3818.68,1728.13 X1.2
NetC13_1: C13.1 U12.8 X1.1 | length 645.4
  Top Layer w15: U12.8 3687.01,1828.74 3740.16,1881.89 3992.13,1881.89 4020.3,1910.06 4021.28,1910.06 4035.43,1924.21 C13.1@4035.43,1925.2 ; C13.1 4038.98,1925.59 4038.98,1764.17 4043.31,1759.84 X1.1@4043.31,1760.63
  Bottom Layer w15: X1.1 X1.1@4044.88,1759.84
NetD1_2: D1.2 Q1.1 R10.2 | length 162.6
  Top Layer w15: Q1.1@2984.25,1625.98 2989.47,1620.77 D1.2@3062.99,1620.77 ; D1.2@3062.99,1618.11 3071.46,1618.11 3083.27,1629.92 R10.2
NetDS1_1: DS1.1 R26.1 | length 88.7
  Top Layer w15: R26.1@4033.46,2290.35 R26.1 4042.7,2308.44 4042.7,2345.85 4055.12,2358.27 DS1.1@4055.12,2370.08
NetDS2_1: DS2.1 R27.1 | length 67.4
  Top Layer w15: R27.1 3895.67,2356.3 DS2.1@3901.57,2362.2 ; DS2.1@3901.57,2364.17 DS2.1@3901.57,2366.14
NetJ4_1: J4.1 S1.2 | length 889.4
  Bottom Layer w30: J4.1@1877.95,2464.57 1910.43,2464.57 1939.9,2494.04 1981.3,2535.43 2637.8,2535.43 S1.2
NetM1_1: M1.1 U1.1 U1.2 | length 800.7
  Top Layer w15: 2479.32,2274.6 U1.1
  Top Layer w30: M1.1@1732.28,2366.14 1740.08,2366.14 1831.63,2274.6 2479.33,2274.6
NetM1_2: M1.2 U1.5 U1.6 | length 995.9
  Top Layer w15: 2438,2173.23 2448.83,2162.4 U1.6 U1.5
  Top Layer w30: M1.2@1594.49,2362.2 1597.73,2365.44 1620.78,2365.44 1812.99,2173.23 2438,2173.23
NetM2_1: M2.1 U1.11 U1.12 | length 3151.9
  Top Layer w15: v1(2385.83,2027.56) 2387.09,2027.56 2394.97,2019.68 ; 2439.58,2019.68 2448.98,2029.09 2448.98,2033.52 2449.91,2034.45 U1.11 ; U1.11@2479.39,2034.45 2480.32,2033.52 U1.12@2480.32,2011.81
  Top Layer w30: 2394.97,2019.68 2439.58,2019.68
  Bottom Layer w30: v1(2385.83,2027.56) 2389.76,2027.56 2803.15,1614.17 4195.02,1614.17 4212.6,1631.75 4212.6,1803.15 4291.34,1881.89 4330.71,1881.89 M2.1@4822.83,2374.02
NetM2_2: M2.2 U1.7 U1.8 | length 3499
  Top Layer w15: 2439.58,2125.98 2448.36,2134.77 2448.36,2135.26 2449.91,2136.81 U1.7
  Top Layer w30: v1@2363.47,2125.98 2439.58,2125.98
  Bottom Layer w30: v1(2362.2,2125.98) 2358.27,2125.98 2318.9,2086.61 2318.9,2031.5 2783.46,1566.93 4221.92,1566.93 4277.04,1622.05 4381.89,1622.05 4958.58,2198.74 4958.58,2360.31 M2.2@4952.76,2366.14
NetR2_1: R2.1 U2.5 U3.3 | length 2303.3
  Top Layer w15: U2.5 3827.95,4754.72 3795.28,4787.4 3630.83,4787.4 3622.05,4778.61 3622.05,4409.45 3708.66,4322.83 4909.45,4322.83 4996.06,4236.22 4996.06,4185.04 5021.28,4185.04 5031.5,4174.82 R2.1@5031.5,4173.23 ; v1(5039.37,4137.8) R2.1@5039.37,4173.23
  Bottom Layer w15: v1(5039.37,4137.8) 5042.32,4134.84 U3.3
NetR3_2: R3.2 U3.1 | length 499.1
  Top Layer w15: R3.2 4827.76,4501.97 4888.78,4440.94 5098.43,4440.94 v1(5181.1,4358.27)
  Bottom Layer w15: v1(5181.1,4358.27) 5181.1,4357 5192.91,4345.19 5192.91,4291.34 U3.1@5188.98,4287.4
NetR5_1: R5.1 U2.7 U5.3 | length 1639
  Top Layer w15: v1(3724.41,4362.2) 3712.6,4362.2 3653.54,4421.26 3653.54,4677.17 3677.56,4701.18 U2.7 ; v1(4448.82,4515.75) 4463.58,4515.75 4483.27,4496.06 R5.1 ; R5.1@4477.27,4501.07 R5.1@4484.25,4494.09
  Bottom Layer w15: v1(3724.41,4362.2) 4062.99,4362.2 4173.23,4472.44 4224.41,4472.44 4287.4,4535.43 4381.89,4535.43 4444.88,4472.44 4500,4472.44 4543.57,4428.87 U5.3@4564.78,4428.87 ; v1(4448.82,4515.75) 4500,4515.75 4564.78,4450.96 U5.3@4564.78,4428.87 ; U5.3 4570.87,4421.26 4564.78,4427.34 U5.3@4564.78,4428.87
NetR7_1: R7.1 U2.9 U7.3 | length 1025.1
  Top Layer w15: U2.9 3777.95,4383.46 3803.15,4358.27 4007.87,4358.27 4040.66,4391.05 4042.41,4391.05 v1(4043.31,4391.95) ; v1(4216.54,4504.15) 4216.54,4505.42 4236.22,4525.11 4236.22,4589.28 4237.49,4590.55 v1@4238.38,4590.55 ; v1@4239.26,4590.55 R7.1@4239.26,4642.63
  Bottom Layer w15: U7.3 4019.68,4585.24 4025.77,4591.32 4032.26,4591.32 4061.61,4620.67 4077.28,4620.67 4078.66,4622.05 4204.72,4622.05 v1@4234.25,4592.52 ; v1(4043.31,4391.95) 4155.51,4504.15 v1(4216.54,4504.15)
  other v1: 4236.22,4590.55
NetR8_2: R8.2 U7.1 | length 777.6
  Top Layer w15: v1(4152.74,4746.02) 4153.29,4745.46 4191.41,4745.46 4192.78,4744.09 4216.54,4744.09 4381.89,4578.74 4671.26,4578.74 R8.2
  Bottom Layer w15: U7.1 4090.55,4739.38 4096.63,4745.46 4096.63,4746.02 v1(4152.74,4746.02)
NetR11_1: R11.1 U2.11 U9.3 | length 604.5
  Top Layer w15: v1(3515.75,4562.99) 3523.62,4555.12 R11.1 ; v1(3877.95,4448.82) U2.11
  Bottom Layer w15: 3507.87,4572.13 3515.75,4564.26 v1(3515.75,4562.99) ; U9.3 3507.87,4574.8 v1@3517.08,4565.59 ; v1@3516.64,4563.36 3517.91,4562.1 3520.58,4562.1 3606.3,4476.38 3869.17,4476.38 3877.95,4467.59 v1(3877.95,4448.82)
NetR14_1: R14.1 U4.5 U11.3 | length 703.6
  Top Layer w15: v1(2755.91,4446.63) 2756.69,4447.42 U4.5 ; v1(2952.76,4446.63) v1(2952.76,4590.55) ; R14.1 v1(3161.42,4602.36)
  Bottom Layer w15: v1(2755.91,4446.63) v1(2952.76,4446.63) ; v1(2952.76,4590.55) 2953.65,4591.45 2958.18,4591.45 U11.3@2996.06,4629.33 ; U11.3 U11.3@2996.06,4629.33 ; v1(3161.42,4602.36) 3145.67,4586.61 3038.78,4586.61 U11.3@2996.06,4629.33
NetR15_1: R15.1 R18.2 U12.19 | length 950.6
  Top Layer w15: R15.1@2952.76,2287.4 2952.76,2291.95 2963.96,2303.15 3203.22,2303.15 ; 3204.72,2303.15 3547.85,2303.15 ; U12.19 3543.31,2205.62 3560.65,2222.96 3560.65,2290.35 3547.85,2303.15 ; R18.2@3732.28,2311.02 3724.41,2303.15 3547.85,2303.15
NetR16_2: R16.2 U11.1 | length 276.6
  Top Layer w15: R16.2 v1(3000,4732.28)
  Bottom Layer w15: v1(3000,4732.28) 3001.27,4732.28 3022.26,4753.27 3035.36,4753.27 3062.99,4780.91 U11.1@3062.99,4795.28
NetR19_1: R19.1 U4.7 U14.3 | length 753.5
  Top Layer w15: U4.7 2856.69,4484.23 2860.61,4480.31 v1(2889.76,4480.31) ; v1(3066.93,4448.82) R19.1@3066.93,4488.19
  Bottom Layer w15: U14.3@2488.19,4574.8 U14.3 2488.19,4504.85 2512.72,4480.31 v1(2889.76,4480.31) 2891.03,4480.31 2897.37,4473.98 3041.77,4473.98 v1(3066.93,4448.82)
NetR22_1: R22.1 U4.9 U16.3 | length 1234.8
  Top Layer w15: R22.1@2145.67,4551.18 R22.1 2192.91,4559.06 v1(2200.79,4566.93) ; U4.9 2807.09,4701.57 v1(2807.09,4748.03)
  Bottom Layer w15: U16.3 1933.07,4393.11 1961.7,4364.48 1983.66,4364.48 1983.99,4364.15 2034.52,4364.15 2043.31,4372.94 2043.31,4409.45 v1(2200.79,4566.93) 2413.39,4779.53 2523.62,4779.53 2543.31,4799.21 2755.91,4799.21 v1(2807.09,4748.03)
NetR23_2: R23.2 U16.1 | length 128
  Top Layer w15: v1@2078.74,4590.55 2082.68,4586.61 R23.2
  Bottom Layer w15: U16.1 2003.94,4568.72 2010.02,4574.8 2065.44,4574.8 2077.47,4586.83 v1(2078.74,4586.83)
NetR25_1: R25.1 U4.11 U18.3 | length 1844.9
  Top Layer w15: v1(1385.83,4082.68) 1488.19,4082.68 1541.34,4135.83 R25.1 ; R25.1@1541.34,4214.57 1541.34,4411.42 1641.73,4511.81 2523.62,4799.21 2696.85,4799.21 2706.69,4789.37 U4.11
  Bottom Layer w15: U18.3@1381.89,4129.92 1385.83,4125.98 v1(1385.83,4082.68)
NetU3_2: U3.2 U5.1 | length 951.6
  Bottom Layer w15: U5.1 4725.39,4565.94 4767.72,4523.62 4901.57,4523.62 4984.25,4440.94 4984.25,4125.98 5023.62,4086.61 5162.01,4086.61 5192.91,4117.52 U3.2@5192.91,4122.05
NetU7_2: U7.2 U9.1 | length 745.6
  Bottom Layer w15: U9.1 3578.74,4784.84 3633.86,4729.72 3633.86,4610.24 3708.66,4535.43 3890.61,4535.43 3914.23,4511.81 4051.77,4511.81 4090.55,4550.59 U7.2
NetU11_2: U11.2 U14.1 | length 637.8
  Top Layer w15: v1(2740.16,4771.65) 2783.46,4814.96 2838.58,4814.96 v1(2894.97,4758.58)
  Bottom Layer w15: U14.1 2559.06,4741.73 2570.2,4752.87 2570.2,4755.64 2588.77,4774.21 2737.6,4774.21 v1(2740.16,4771.65) ; v1(2894.97,4758.58) 2948.82,4704.72 3026.18,4704.72 3070.87,4660.04 U11.2@3070.87,4649.61
NetU16_2: U16.2 U18.1 | length 649.3
  Bottom Layer w15: U18.1@1460.63,4295.28 1590.55,4295.28 1763.78,4468.5 1963.19,4468.5 2003.94,4427.76 U16.2
RST: J1.05 R20.2 U12.29 | length 1308.9
  Top Layer w15: v1(3248.03,1775.59) 3248.03,1952.05 3272.36,1976.38 U12.29 ; J1.05 3842.03,1978.25 3871.95,1978.25 3911.4,2017.7 4020.3,2017.7 4027.56,2010.43 R20.2@4027.56,2003.94
  Bottom Layer w15: v1(3248.03,1775.59) 3354.33,1669.29 3639.17,1669.29 3834.65,1864.76 J1.05@3834.65,1972.44
SCK: J1.03 U12.17 | length 269.4
  Top Layer w15: U12.17 3608.27,2157.48 3752.76,2157.48 J1.03 3838.58,2071.65 J1.03@3838.58,2070.87
pads on no net: J2.10 J2.Z1 J2.Z2 J3.3 J3.Z1 J3.Z2 S1.3 U12.22 U12.27 U12.28

## Keep-outs
Keep-Out Layer: